# EAGLE board garbageSensor (EAGLE 6.4)
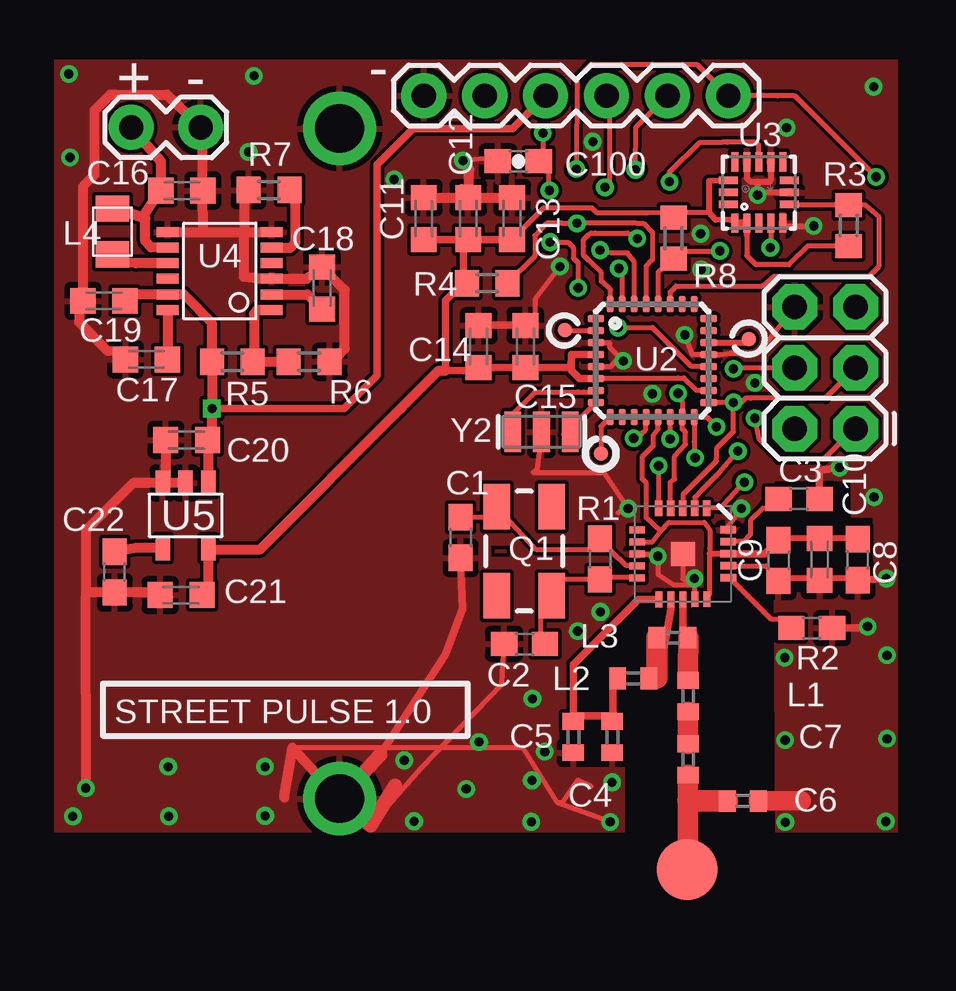
[diagram p0: board, top side]
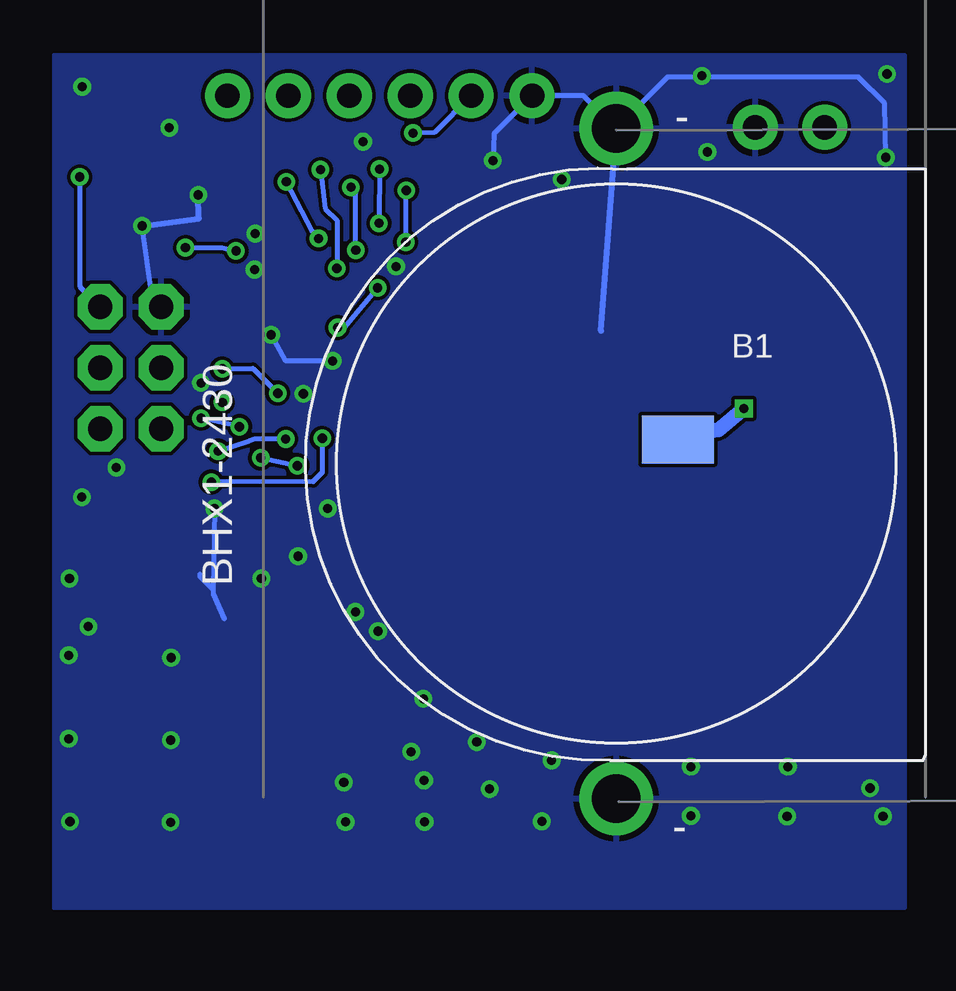
[diagram p1: board, bottom side, seen from below]

No outline drawn. Coordinates in mm, seen from the top.
Copper layers (1*16): Top 0.0356mm / dielectric 1.5011mm / Bottom 0.0356mm
Design rules "default": minimum track width 6mil, minimum drill 15mil, track to track 6mil, track to pad 6mil, pad to pad 6mil, via to via 6mil, smd to smd 6mil, copper to edge 15mil, drill to drill 6mil, minimum pad ring 7mil, minimum via ring 7mil, stop-mask expansion 4mil, vias tented up to drill 20mil, thermal gap 10mil

## Footprints (pad centres in the part's own frame; a part is rotated, then mirrored left to right if it is on the bottom)
BHX1-2325 = smd 2 x 3: + 1,-2.58 | drill 2.032: L- -13.97,0; R- 13.97,0
0603 = smd 1.1 x 1: 1 -0.85,0; 2 0.85,0
C0402 = smd 0.7 x 0.9: 1 -0.65,0; 2 0.65,0
C0603K = smd 1.05 x 1.08: 1 -0.875,0; 2 0.875,0
0603-CAP = smd 1.1 x 1: 1 -0.85,0; 2 0.85,0
TP06R = smd 0.6 x 0.6: TP 0,0
1X06 = drill 1.016 pad 1.88: 1 0,0; 2 2.54,0; 3 5.08,0; 4 7.62,0; 5 10.16,0; 6 12.7,0
2X3 = drill 1.016 pad 1.88 octagon: 1 0,0; 2 0,2.54; 3 2.54,0; 4 2.54,2.54; 5 5.08,0; 6 5.08,2.54
0806 = smd 1.1 x 1.4: P$1 -0.95,0; P$2 0.95,0
CRYSTAL-SMD-5X3 = smd 1.9 x 1.1: 1 -1.85,-1.15; 2 1.85,-1.15; 3 1.85,1.15; 4 -1.85,1.15
R0603 = smd 1 x 1.1: 1 -0.85,0; 2 0.85,0
1X02_LOCK = drill 1.016 pad 1.88: 1 -0.178,0; 2 2.718,0
B2,54 = smd 2.54 x 2.54: TP 0,0
QFN20 = smd 1 x 1: 0 0,0 | smd 0.65 x 0.3: 1 -1.9,1; 2 -1.9,0.5; 3 -1.9,0; 4 -1.9,-0.5; 5 -1.9,-1; 11 1.9,-1; 12 1.9,-0.5; 13 1.9,0; 14 1.9,0.5; 15 1.9,1 | smd 0.3 x 0.65: 6 -1,-1.9; 7 -0.5,-1.9; 8 0,-1.9; 9 0.5,-1.9; 10 1,-1.9; 16 1,1.9; 17 0.5,1.9; 18 0,1.9; 19 -0.5,1.9; 20 -1,1.9
MLF32 = smd 0.7 x 0.3: 1 -2.35,1.75; 2 -2.35,1.25; 3 -2.35,0.75; 4 -2.35,0.25; 5 -2.35,-0.25; 6 -2.35,-0.75; 7 -2.35,-1.25; 8 -2.35,-1.75; 17 2.35,-1.75; 18 2.35,-1.25; 19 2.35,-0.75; 20 2.35,-0.25; 21 2.35,0.25; 22 2.35,0.75; 23 2.35,1.25; 24 2.35,1.75 | smd 0.3 x 0.7: 9 -1.75,-2.35; 10 -1.25,-2.35; 11 -0.75,-2.35; 12 -0.25,-2.35; 13 0.25,-2.35; 14 0.75,-2.35; 15 1.25,-2.35; 16 1.75,-2.35; 25 1.75,2.35; 26 1.25,2.35; 27 0.75,2.35; 28 0.25,2.35; 29 -0.25,2.35; 30 -0.75,2.35; 31 -1.25,2.35; 32 -1.75,2.35
QFN-16_0.5MM = smd 0.8 x 0.3: 1 -1.275,1; 2 -1.275,0.5; 3 -1.275,0; 4 -1.275,-0.5; 5 -1.275,-1; 9 1.275,-1; 10 1.275,-0.5; 11 1.275,0; 12 1.275,0.5; 13 1.275,1 | smd 0.3 x 0.8: 6 -0.5,-1.275; 7 0,-1.275; 8 0.5,-1.275; 14 0.5,1.275; 15 0,1.275; 16 -0.5,1.275
MSOP-12 = smd 0.42 x 0.9: 1 -1.625,-2.165; 2 -0.975,-2.165; 3 -0.325,-2.165; 4 0.325,-2.165; 5 0.975,-2.165; 6 1.625,-2.165; 7 1.625,2.165; 8 0.975,2.165; 9 0.325,2.165; 10 -0.325,2.165; 11 -0.975,2.165; 12 -1.625,2.165
TPS79133DBVR_(LDO_3_3V_TI) = smd 0.6 x 1.05: 1 -0.95,-1.35; 2 0,-1.35; 3 0.95,-1.35; 4 0.95,1.35; 5 -0.95,1.35
RESONATOR-SMD = smd 0.7 x 1.7: 1 -1.2,0; 2 0,0; 3 1.2,0

## Placement (x,y rotation side)
B1  BATT_CONNECTOR  [BHX1-2325]  12.26,18.71 90 bottom
C1  22pF  [0603]  17.3,15.63 270 top
C2  22pF  [0603]  19.97,11.19 180 top
C3  33nF  [0603]  31.41,17.24 0 top
C4  2.2nF  [C0402]  23.62,7.31 270 top
C5  4.7pF  [C0402]  22,7.31 270 top
C6  1.0pF  [C0402]  29.07,4.65 180 top
C7  1.5pF  [C0402]  26.78,6.37 270 top
C8  10nF  [0603]  33.85,14.7 90 top
C9  1nF  [0603]  30.55,14.67 90 top
C10  10uF  [C0603K]  32.26,14.71 270 top
C11  100nF  [C0603K]  15.76,28.92 90 top
C12  100nF  [C0603K]  17.62,28.92 90 top
C13  4.7uF  [C0603K]  19.45,28.92 90 top
C14  0.1uF  [C0603K]  18.05,23.58 270 top
C15  0.1uF  [C0603K]  20,23.59 270 top
C16  10uF  [C0603K]  5.68,30.09 0 top
C17  1uF  [C0603K]  4.21,23.05 180 top
C18  4.7uF  [C0603K]  11.52,26.03 90 top
C19  10uF  [C0603K]  2.43,25.49 180 top
C20  100nF  [C0603K]  5.88,19.7 0 top
C21  1uF  [C0603K]  5.65,13.22 180 top
C22  10nF  [0603]  2.88,14.19 90 top
C100  0.1uf  [0603-CAP]  19.71,31.31 180 top
D5  TPTP06R  [TP06R]  23.14,19.13 0 top
FTDI  FTDI  [1X06]  15.76,34.05 0 top
J1  AVR_SPI_PRG_6PTH  [2X3]  33.77,20.16 90 top
L1  3.9nH  [C0402]  26.78,9.02 270 top
L2  2.7nH  [C0402]  24.49,9.75 180 top
L3  8.2nH  [C0402]  26.14,11.45 180 top
L4  10uH  [0806]  2.78,28.39 270 top
Q1  16MHz  [CRYSTAL-SMD-5X3]  19.95,15.06 270 top
R1  1M  [0603]  23.1,14.73 270 top
R2  22K  [0603]  31.94,11.85 0 top
R3  10k  [R0603]  33.48,28.63 270 top
R4  10k  [R0603]  18.41,26.23 180 top
R5  1024k  [R0603]  7.79,22.95 0 top
R6  332k  [R0603]  10.99,22.95 0 top
R7  40.2k  [R0603]  9.31,30.11 0 top
R8  10k  [R0603]  26.18,28.11 90 top
SOLAR  SOLAR  [1X02_LOCK]  6.29,32.72 180 top
TP1  TPB2,54  [B2,54]  26.75,1.78 0 top
TP2  TPTP06R  [TP06R]  29.31,23.9 0 top
TP3  TPTP06R  [TP06R]  21.64,24.28 0 top
U1  NRF24L01SMD  [QFN20]  26.56,14.95 270.1 top
U2  ATMEGA168MLF  [MLF32]  25.29,23 0 top
U3  MMA8452Q  [QFN-16_0.5MM]  29.73,30.01 90 top
U4  CHARGER  [MSOP-12]  7.25,26.74 90 top
U5  Voltage_regulator  [TPS79133DBVR_(LDO_3_3V_TI)]  5.83,16.55 180 top
Y2  RESONATORSMD  [RESONATOR-SMD]  20.67,20.03 0 top

## Library data of the parts
B1 = CONNECTORS; MOUNTING: Through hole; SIZE: 24.5mm
C1-C9 C22 L1-L3 Q1 R1 R2 U1 = SparkFun
C10-C21 R3-R8 = resistor
C100 = SparkFun-Capacitors
D5 TP1-TP3 = testpad
FTDI J1 SOLAR = SparkFun-Connectors
L4 = INDUCTORS
U2 = SparkFun-DigitalIC
U3 = SparkFun-Sensors
U4 = DC-DC_CONVERTERS
U5 = REGULATORS
Y2 = SparkFun-FreqCtrl

## Nets
+3V3: C11.1 C12.1 C13.1 C14.2 C15.2 C21.1 R3.2 R4.2 R8.2 U2.4 U2.6 U2.18 U3.1 U3.2 U3.14 U5.5
ACCELERO_INTERRUPT: U2.32 U3.11
ANT: C6.2 C7.2 TP1.TP
ANTENNA1: L1.1 L3.1 U1.13
ANTENNA2: L2.1 L3.2 U1.12
ANTENNA3: C4.1 C5.1 L2.2 U1.11
AREF: C100.1 FTDI.2 U2.20
AUX: C17.1 U4.12
CE: U1.1 U2.12
CSN: U1.2 U2.14
FB: R5.2 R6.1 U4.1
GND: B1.L- B1.R- C1.2 C2.2 C3.2 C4.2 C5.2 C6.1 C8.1 C9.1 C10.2 C11.2 C12.2 C13.2 C14.1 C15.1 C16.2 C17.2 C18.2 C19.2 C20.1 C21.2 C22.1 C100.2 FTDI.1 J1.6 R2.2 R6.2 R7.1 SOLAR.1 U1.0 U1.8 U1.14 U1.17 U1.20 U2.3 U2.5 U2.21 U3.5 U3.7 U3.10 U3.12 U4.3 U4.6 U4.7 U5.2 U5.3 Y2.2
LDO: C18.1 U4.2
MISO: J1.1 U1.5 U2.16
MOSI: J1.4 U1.4 U2.15
MPPC: R7.2 U4.5
N$1: C1.1 Q1.1 R1.1 U1.9
N$2: C2.1 Q1.3 R1.2 U1.10
N$3: D5.TP U2.9
N$4: R2.1 U1.16
N$5: C3.1 U1.19
N$6: TP3.TP U2.2
N$7: TP2.TP U2.22
N$9: C7.1 L1.2
N$10: C22.2 U5.4
N$11: L4.P$2 U4.9
RESET: FTDI.6 J1.5 R4.1 U2.29
RX: FTDI.4 U2.30
SCK: J1.3 U1.3 U2.17
SCL: R8.1 U2.28 U3.4
SDA: R3.1 U2.27 U3.6
SOLAR: C16.1 L4.P$1 SOLAR.2 U4.8
TX: FTDI.5 U2.31
VBATT: B1.+ C19.1 C20.2 FTDI.3 R5.1 U4.11 U5.1
WIRELESS_POWER_LINE: C8.2 C9.2 C10.1 U1.7 U1.15 U1.18 U2.13
XTAL1: U2.7 Y2.1
XTAL2: U2.8 Y2.3

## Tracks (layer width: path | path; a pad name or v marks a point on that pad's centre or on a via)
+3V3
  Top 0.203: U2.6 23.19,22.28 26.36,22.28 26.62,22.28 27.13,21.77 27.62,21.77 | 27.62,21.77 U2.18 27.62,21.77 | 29.23,28.24 29.23,27.38 29.62,27 30.99,27 31.77,27.79 R3.2 | 27.65,29.2 26.34,29.2 R8.2 25.91,29.16 25.09,29.16 22.99,29.16 22.78,29.36 20.75,29.36 20.26,28.86 C13.1
  Top 0.254: U3.14 27.65,30.49 27.65,30.43 27.65,30.33 27.65,29.87 27.65,29.2 27.93,28.86 28.56,28.87 28.7,28.87 U3.1 | U3.2 29.23,28.24
  Top 0.305: C12.1 C11.1 15.76,28.22 | C12.1 C13.1 | U3.1 U3.2 | C12.1 17.41,27.94 17.41,26.37 R4.2 17.36,26.2 16.66,25.5 16.66,22.58 18.05,22.58 | C14.2 C15.2 | C15.2 19.98,22.7 | U2.4 21.92,23.25 | 21.92,23.25 21.91,22.72 C15.2 | U2.6 22.25,22.25 21.92,22.58 21.92,23.25 | 16.38,22.58 16.39,22.58
  Top 0.406: 6.7,13.55 C21.1 | C14.2 18.05,22.58 | 6.84,13.01 C21.1 | C21.1 6.78,13.35 U5.5 6.84,15.14 8.94,15.14 14.82,21.02 16.39,22.58 16.66,22.58 | 20.02,22.73 C15.2
ACCELERO_INTERRUPT  (via drill 0.38)
  Top 0.203: U3.11 29.73,31.99 29.62,32.11 28.42,32.11 28.19,32.11 27.28,32.11 26.01,30.86 v26.01,30.45 | U2.32 23.55,25.95 23.16,26.31 23.16,26.67 22.66,27.18 22.43,27.41 22.43,27.79 22.43,28.04 22.66,28.27 22.73,28.32 22.91,28.32 24.26,28.32 24.46,28.22 v24.66,28.09
  Bottom 0.203: v26.01,30.45 24.94,28.4 v24.66,28.09
ANT
  Top 0.203: 26.77,1.73 26.95,1.73 TP1.TP
  Top 0.864: 26.77,1.73 26.77,4.65 26.78,4.66 C7.2
  Top 0.889: C6.2 26.98,4.65 26.77,4.65
ANTENNA1
  Top 0.305: U1.13 26.57,11.89 26.57,11.45 L3.1
  Top 0.61: L1.1 26.78,10.11
  Top 0.864: 26.78,10.11 L3.1
ANTENNA2
  Top 0.203: 25.49,9.77 L2.1 | 25.78,11.01 L3.2
  Top 0.305: U1.12 26.06,12.63 26.06,12.62 25.78,11.01
  Top 0.889: L3.2 25.49,9.77
ANTENNA3
  Top 0.203: 21.96,7.86 C5.1 | 22,7.88 C5.1 | 23.65,8.18 C4.1 | 22.02,8.18 C5.1 | 23.65,9.7 L2.2
  Top 0.305: U1.11 24.98,13.04 24.7,13.04 22,10.34 22,7.88 | 22.02,8.18 23.65,8.18 23.65,9.7
AREF  (via drill 0.38)
  Top 0.203: v20.73,32.49 20.73,32.2 20.73,31.75 C100.1 20.98,30.92 20.98,30.79 20.98,30.18 v21.01,30.1 | v23.87,24.38 24.06,24.38 25.3,24.38 26.9,22.78 27.61,22.78 U2.20 | v21.03,27.94 21.36,27.94 21.77,27.94 22,27.71 22,27.28 22.2,27.08 v22.2,26.04
  Bottom 0.203: FTDI.2 19.84,32.51 v20.73,32.49 | v22.2,26.04 23.6,24.38 v23.87,24.38 | v21.01,30.1 21.03,30.05 v21.03,27.94
AUX
  Top 0.406: U4.12 5.09,23.81 C17.1
CE  (via drill 0.38)
  Top 0.203: 27.55,17.01 U1.1 28.13,16.85 28.29,17.01 v29.13,17.93 | U2.12 25.04,20.41 24.99,20.37 24.99,20.09 24.84,19.94 24.43,19.94 v24.51,19.76
  Bottom 0.203: v24.51,19.76 24.51,18.34 24.89,17.96 28.55,17.93 v29.13,17.93
CSN  (via drill 0.38)
  Top 0.203: v26.04,19.74 26.04,19.79 U2.14 | U1.2 27.05,17.12 27.05,17.15 | v28.85,19.23 28.09,18.34 27.36,17.6 27.05,17.3 U1.2 | 27.08,16.87 U1.2
  Bottom 0.203: v28.85,19.23 27.56,19.66 27.33,19.74 v26.04,19.74
EMPTY
  pour Top (isolate 1.676): 11.33,23.75 11.2,26.16 10.9,27.25 9.86,29.54 8.89,29.54 6.3,29.59 6.3,32.99 3.23,32.99 3.25,29.64 2.51,29.59 2.51,24.49 3.23,23.77
EMPTY2
  pour Top (isolate 0.406): 1.57,5.05 1.75,5.05 1.83,5.16 1.83,5.23 1.68,5.33 1.7,12.9 5.11,12.88 5.11,13.69 1.8,13.72 1.8,15.9 3.48,17.58 5.59,17.58 5.94,17.6 5.99,17.75 6.05,17.81 6.02,18.24 5.18,18.24 5.16,18.11 5.16,19.18 5.38,19.33 5.38,19.96 5.23,20.07 4.65,20.07 4.6,19.96 4.6,19.41 4.72,19.28 4.8,19.28 4.93,19.15 4.93,18.21 4.7,17.98 3.58,17.98 1.63,15.95 1.63,5.38 1.5,5.28 1.5,5.16
EMPTY3
  pour Top (isolate 0.813): 18.85,17.09 20.93,17.09 20.95,15.49 24.43,15.44 24.43,14.02 20.62,14.02 20.7,12.22 18.85,12.22
EMPTY4
  pour Top (isolate 0.406): 30.61,12.17 33.2,12.17 33.2,11.53 30.61,11.53
FB
  Top 0.406: U4.1 8.81,25.12 8.69,24.94 8.69,23 R5.2 R6.1
GND  (via drill 0.38)
  Top 0.203: 30.96,13.94 C9.1 30.05,14.45 28.98,14.45 U1.17 | U1.8 25.32,14.94 25.53,14.73 25.53,14.1 26.19,13.64 26.9,13.64 | 26.9,13.64 26.75,13.79 27.05,13.59 U1.14 | U2.3 23.52,23.75 23.52,23.55 v24.08,22.99 23.77,22.99 23.54,22.75 U2.5 | v26.64,24.08 26.96,23.25 U2.21 28.1,23.25 28.57,23.32 29.71,23.32 J1.6 | 28.45,15.96 U1.20 28.46,16.11 v29.01,16.84 | 34.44,13.88 C8.1 | 34.18,11.85 v34.26,11.92 | C2.2 19.03,9.53 15.65,6.03 13.55,3.62 | U1.0 26.56,13.9 26.9,13.64 | Y2.2 20.49,18.47 20.32,18.34 23.27,18.34 v24.28,16.84 23.88,16.66 | C100.2 18.52,31.45 v17.4,31.34 | 20.17,24.64 20.19,24.64 20.42,24.87 20.42,25.58 v21.44,26.92 | v23.54,3.77 21.34,4.57 | 21.34,4.57 19.91,6.87 10.29,6.87 | 22.74,5.24 22.16,5.5 21.52,4.57 21.34,4.57 | 34.52,13.88 35.03,13.88 v35.05,13.92
  Top 0.254: U3.10 30.23,30.51 30.19,30.47 29.68,30.47 | U3.12 29.23,30.61 29.38,30.47 29.68,30.47 | 29.68,30.47 v29.68,29.91 29.78,30.01 U3.7 | U3.5 30.78,28.61 v32.02,28.62 | C8.1 34.14,13.93 32.38,13.93 32.1,13.94 C10.2 32.44,13.94 30.96,13.94 | 20.17,24.64 C15.1
  Top 0.305: 5.17,13.12 5.04,13.03 C21.2 4.89,13.23 | C15.1 19.94,24.49 18.08,24.49 C14.1 | R2.2 34.18,11.85 | C1.2 17.37,12.65 16.66,10.74 13.95,6.56 | v33.1,18.54 32.26,18.41 C3.2 | 34.44,13.88 34.52,13.88
  Top 0.406: 8.27,28.36 U4.7 6.57,28.37 C16.2 6.54,31.09 6.54,32.47 SOLAR.1 5.05,34.09 2.9,34.09 2.69,34.09 2.03,33.43 2.03,30.73 1.55,30.25 C19.2 | 8.27,28.36 U4.6 | 8.27,28.36 8.27,28.26 8.27,26.48 8.85,26.41 U4.3 10.88,26.41 C18.2 12.47,25.95 12.47,23.5 12.09,23.11 R6.2 | C11.2 C12.2 | C12.2 C13.2 | U5.3 U5.2 5.81,17.92 | C17.2 3.1,23.29 3.1,23.39 2.61,23.38 1.4,24.61 1.4,25 C19.2 | 4.98,19.72 C20.1 5.01,18.02 U5.3 | R7.1 8.28,29.92 8.28,28.37 8.27,28.36 | C19.2 1.37,25.67 | 9.94,4.79 10.29,6.87 B1.L- | v1.68,5.18 1.65,13.03 1.68,13.31 1.7,13.34 | C21.2 4.66,13.34 C22.1 1.7,13.34 | U5.3 3.65,17.9 1.68,15.93 1.68,13.37 1.7,13.34 | C12.2 17.62,29.88 17.35,30.15 17.65,30.15 17.65,30.96 v17.4,31.34
  Top 0.61: 14.56,5.28 13.55,3.62 B1.L- 13.95,6.56
  Top 0.813: C6.1 31.49,4.65
  Bottom 0.203: v17.4,31.34 17.35,32.46 FTDI.1 13.62,34.05 B1.R- 10.11,34.82 2.16,34.82 1.07,33.73 v1.02,31.47 | J1.6 31.61,25.63 v32.02,28.62 | v24.08,22.99 26.04,22.99 v26.64,24.08 | 29.06,13.46 v29.01,16.84 29.06,16.54 | 29.06,13.46 29.06,13.28 28.6,12.24 | 29.62,14.1 29.62,14.02 29.06,13.46
  Bottom 0.254: v32.02,28.62 29.66,28.92 v29.68,29.91 | 12.89,24.25 B1.R-
  other vias: 23.61,5.42 30.82,7.18 25.3,21.62 29.57,22.07 22.81,32.13 27.3,28.3 27.33,26.8 14.95,6.34 34.53,17.31 18.07,7.1 22.18,11.72 17.53,5.14 20.25,3.77 20.27,5.5 20.8,6.7 20.3,8.91 23.13,12.53 30.84,3.76 35.08,10.72 35.08,7.24 35.03,3.78 8.46,31.7 15.36,3.8 25.52,14.85 30.89,32.72 1.13,4 5.13,4 9.15,4.03 5.11,6.07 9.14,6.07 30.81,10.62 34.52,34.42 0.97,34.95 8.69,34.87 27.05,13.92 14.53,30.56
  pour Bottom: 0.23,35.71 35.69,35.71 35.69,0.2 0.23,0.2
  pour Top (isolate 0.152, rank 2): 0.41,35.53 35.48,35.53 35.48,3.35 30.45,3.35 30.4,13.31 34.54,13.31 34.52,16.28 34.52,16.48 33.6,16.48 33.6,17.98 33.43,17.98 30.38,18.01 28.68,15.77 25.7,13.08 24.46,13.08 23.44,12.06 22.1,10.41 22.1,8.23 21.51,8.23 21.56,7.59 21.36,7.59 21.36,7.14 21.51,7.11 21.51,6.35 22.56,6.35 22.48,6.02 23.16,6.02 23.14,6.32 24.1,6.32 24.1,3.35 0.41,3.35
  pour Top (no thermals): 26.14,15.85 26.14,15.77 25.53,15.09 25.5,13.94 25.91,13.94 26.19,13.67 26.9,13.64 27.38,13.64 27.43,15.37 26.85,15.9 26.19,15.9
LDO
  Top 0.406: U4.2 10.91,25.76 C18.1
MISO  (via drill 0.38)
  Top 0.203: v27.96,20.24 27.56,20.65 U2.16 27.04,19.62 27.04,19.16 27.08,19.13 v27.08,18.95 | v25.55,18.62 U1.5 | J1.1 33.7,20.16 32.44,18.9 30.58,18.9 29.74,19.74 v29.57,20.6
  Bottom 0.203: v27.08,18.95 27.03,18.95 v25.55,18.62 | v27.96,20.24 v29.57,20.6
MOSI  (via drill 0.38)
  Top 0.203: v26.36,21.64 26.54,21.29 U2.15 26.54,20.14 26.67,20.02 26.67,19.51 26.21,19 26.21,18.06 26.04,17.93 26.04,16.87 U1.4 | v28.68,22.66 28.72,22.7 J1.4
  Bottom 0.203: v26.36,21.64 27.4,22.68 28.66,22.68 v28.68,22.66
MPPC
  Top 0.406: U4.5 10.21,27.71 10.41,27.91 10.41,29.86 R7.2
N$1
  Top 0.203: 18.91,17.57 19.09,17.57 | U1.9 24.22,14.44 23.93,14.73 23.9,14.73 23.22,15.42 | 23.22,15.42 | 23.22,15.42 R1.1 23.38,15.21 22.63,15.11 20.47,15.11 Q1.1 18.8,16.41 18.62,16.23 18.37,16.48 C1.1
  Top 0.254: 18.78,17.19 Q1.1 18.91,17.56 18.91,17.57 18.73,17.19
N$2
  Top 0.203: U1.10 24.44,13.89 24.43,13.97 22.96,13.97 R1.2 21.43,13.88 21.11,13.94 | C2.1 20.44,11.34 20.65,11.66 20.65,12.27 20.78,12.5 20.78,12.88 Q1.3
  Top 0.254: 20.86,13.77 20.94,13.59 20.99,13.82 | 20.99,13.82 Q1.3 | 21.11,13.94 20.99,13.82
N$3
  Top 0.203: U2.9 23.14,20.25 D5.TP
N$4
  Top 0.203: U1.16 28.52,13.95 29.69,12.78 30.23,12.24 30.63,12.24 31.03,11.85 R2.1
N$5
  Top 0.203: U1.19 28.5,15.49 | U1.19 | C3.1 30.96,17.24 30.56,16.84 29.9,16.84 29.39,16.33 29.39,15.77 29.08,15.47 28.48,15.47 U1.19
N$6
  Top 0.203: TP3.TP 21.67,24.25 U2.2
N$7
  Top 0.254: U2.22 29.16,23.75 TP2.TP
N$9
  Top 0.864: C7.1 L1.2
N$10
  Top 0.406: U5.4 3.79,15.2 C22.2
N$11
  Top 0.406: U4.9 3.77,27.06 3.09,27.09 3.14,27.19 2.56,27.19 L4.P$2
RESET  (via drill 0.38)
  Top 0.203: FTDI.6 28.48,34.04 | FTDI.6 27.18,35.33 22.71,35.33 22.15,34.75 v22.12,30.99 | 19.35,26.23 R4.1 20.4,27.36 20.4,28.22 20.88,28.73 21.54,28.73 v22.15,28.73 24.64,28.73 24.77,28.73 24.92,28.73 25.3,28.35 25.3,27.2 25.04,26.94 U2.29 | 28.48,34.04 30.5,34.04 31.19,34.04 31.24,34.04 v34.62,30.66 | 28.48,34.04 FTDI.6
  Bottom 0.203: v34.62,30.66 34.62,26.09 J1.5 | v22.12,30.99 22.15,28.88 v22.15,28.73
RX  (via drill 0.38)
  Top 0.203: 23.39,33.83 FTDI.4 23.52,33.91 23.52,30.4 23.34,30.23 v23.32,30.23 | U2.30 24.54,27.13 24.26,27.48 23.57,27.48 v23.11,27.61
  Bottom 0.203: v23.11,27.61 23.11,30.02 v23.32,30.23
SCK  (via drill 0.38)
  Top 0.203: U2.17 27.68,21.21 27.94,21.21 | 27.73,21.26 U2.17 | v28.68,21.26 28.19,21.26 U2.17 | U1.3 26.55,17.11 | v28.68,21.26 28.68,20.04 28.22,19.58 27.96,19.33 27.96,18.95 27.96,18.82 26.59,17.45 26.59,16.89 U1.3 | U1.3 26.54,16.86 U1.3 | J1.3 32.5,21.44 29.39,21.44 29.18,21.44 29.01,21.26 v28.68,21.26
  Bottom 0.203: 28.8,21.39 v28.68,21.26
SCL  (via drill 0.38)
  Top 0.203: U3.4 30.23,27.82 v30.21,27.71 | U2.28 25.54,26.25 25.54,26.7 R8.1 25.91,27.56 v28.11,27.57
  Bottom 0.203: v30.21,27.71 30.18,27.7 28.69,27.7 v28.11,27.57
SDA
  Top 0.203: U2.27 26.04,25.86 26.29,26.11 29.87,26.11 30.35,26.52 34.34,26.52 34.75,26.95 34.75,28.04 34.75,28.98 34.16,29.49 R3.1 32.92,29.51 U3.6
SOLAR
  Top 0.203: 4.51,29.68 4.51,29.8 C16.1
  Top 0.406: U4.8 4.38,27.73 4.15,27.98 4.15,28.94 3.02,29.34 2.78,29.13 L4.P$1 4.03,28.97 4.51,29.68 | SOLAR.2 4.8,31.31 C16.1
TX  (via drill 0.38)
  Top 0.203: 24.05,25.37 U2.31 24.04,26.71 v23.9,26.85 | v24.59,30.96 24.61,32.74 FTDI.5
  Bottom 0.203: v24.59,30.96 24.38,29.34 23.9,28.85 v23.9,26.85
VBATT  (via drill 0.38)
  Top 0.305: FTDI.3 19.46,32.66 15.32,32.66 13.82,31.17 13.82,30.76 13.82,29.95 13.82,29.92 13.82,27.61 13.82,24.92 13.82,22.91 13.82,22.38 12.45,21.01 12.39,21.01 v6.93,21.01
  Top 0.406: C19.1 3.57,25.76 4.37,25.76 U4.11 5.12,25.76 5.77,25.76 6.94,24.56 R5.1 v6.93,21.01 6.93,19.88 6.94,19.88 C20.2 | 6.79,19.56 C20.2 | C20.2 6.76,19.61 | C20.2 6.91,19.55 6.78,19.42 U5.1
  Bottom 0.61: 9.58,20.04 10.01,20.19 10.44,19.94 B1.+ 8.92,19.71 8.53,20.09 8.18,20.09 8.15,20.12 8,20.12 v6.93,21.01
WIRELESS_POWER_LINE
  Top 0.203: U1.7 25.3,15.44 25.65,15.9 | 25.65,15.9 25.98,16.26 27.46,16.26 27.69,15.95 27.69,15.19 27.69,14.96 27.69,13.31 U1.15 | 25.65,15.9 25.04,16.46 25.04,17.91 24.87,18.09 24.87,18.97 25.32,19.43 25.32,19.89 25.53,20.14 25.53,20.64 U2.13 | 30.84,15.44 C9.2 | 30.75,15.41 C9.2 | 30.62,15.28 C9.2
  Top 0.254: 32.11,15.59 C10.1 32.55,15.63 32.11,15.59 | 32.11,15.59 30.8,15.59 30.69,15.43 30.75,15.41 C9.2 | 32.11,15.59 32.12,15.61 33.95,15.61 C8.2 | 27.69,14.96 28.45,14.96 U1.18
  Top 0.305: U1.18 29.98,14.95 C9.2
XTAL1
  Top 0.203: 22.92,21.77 U2.7 22.88,21.69 22.43,21.69 22.17,21.69 20.4,21.69 19.38,20.7 19.38,20.14 Y2.1
XTAL2
  Top 0.203: Y2.3 21.59,19.9 U2.8

## Text on the board
_tsilk: + | - | - | STREET PULSE 1.0